# EAGLE board dp (EAGLE 7.5.0)
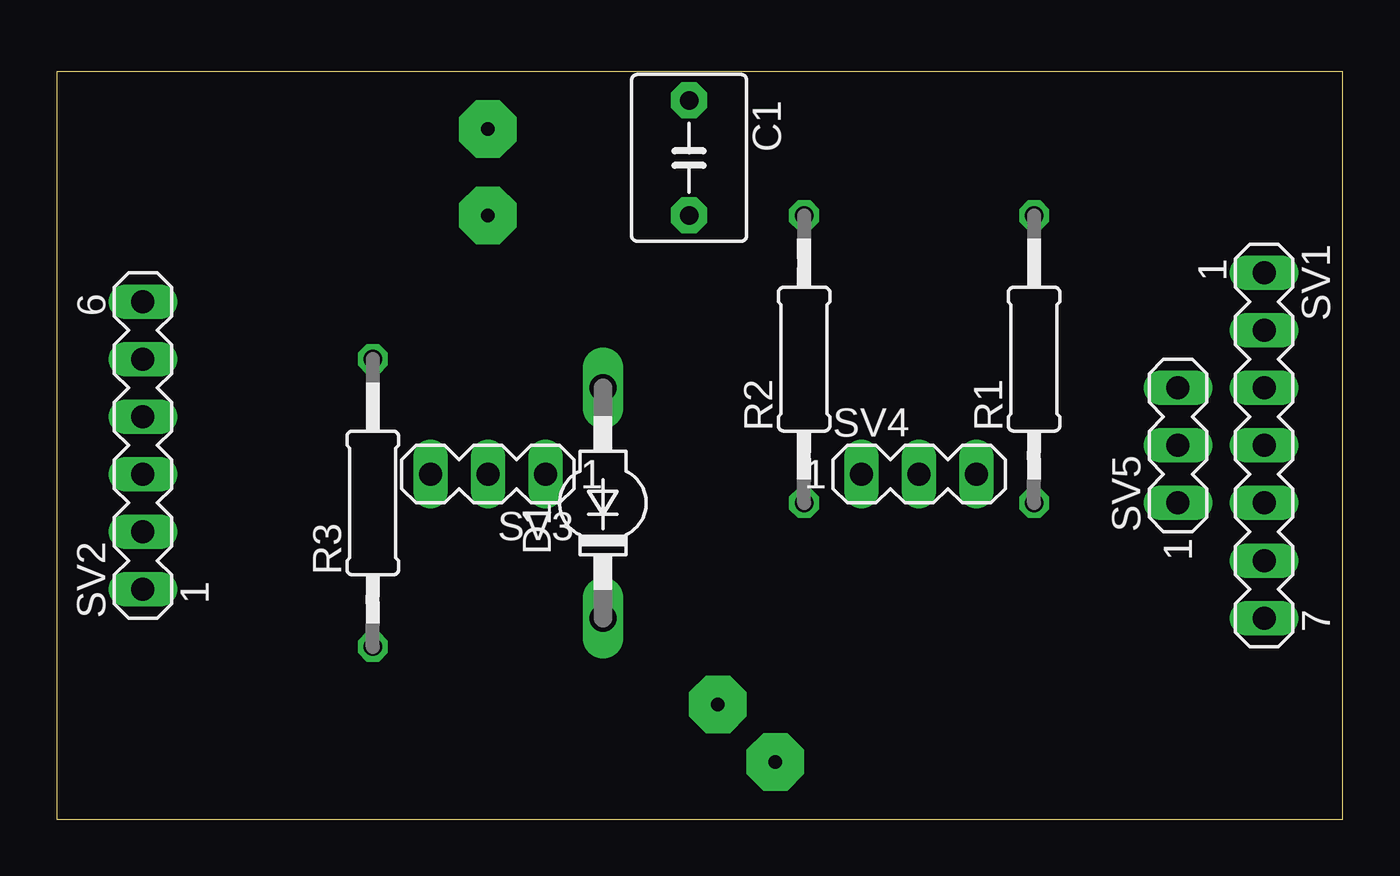
[diagram p0: board, top side]
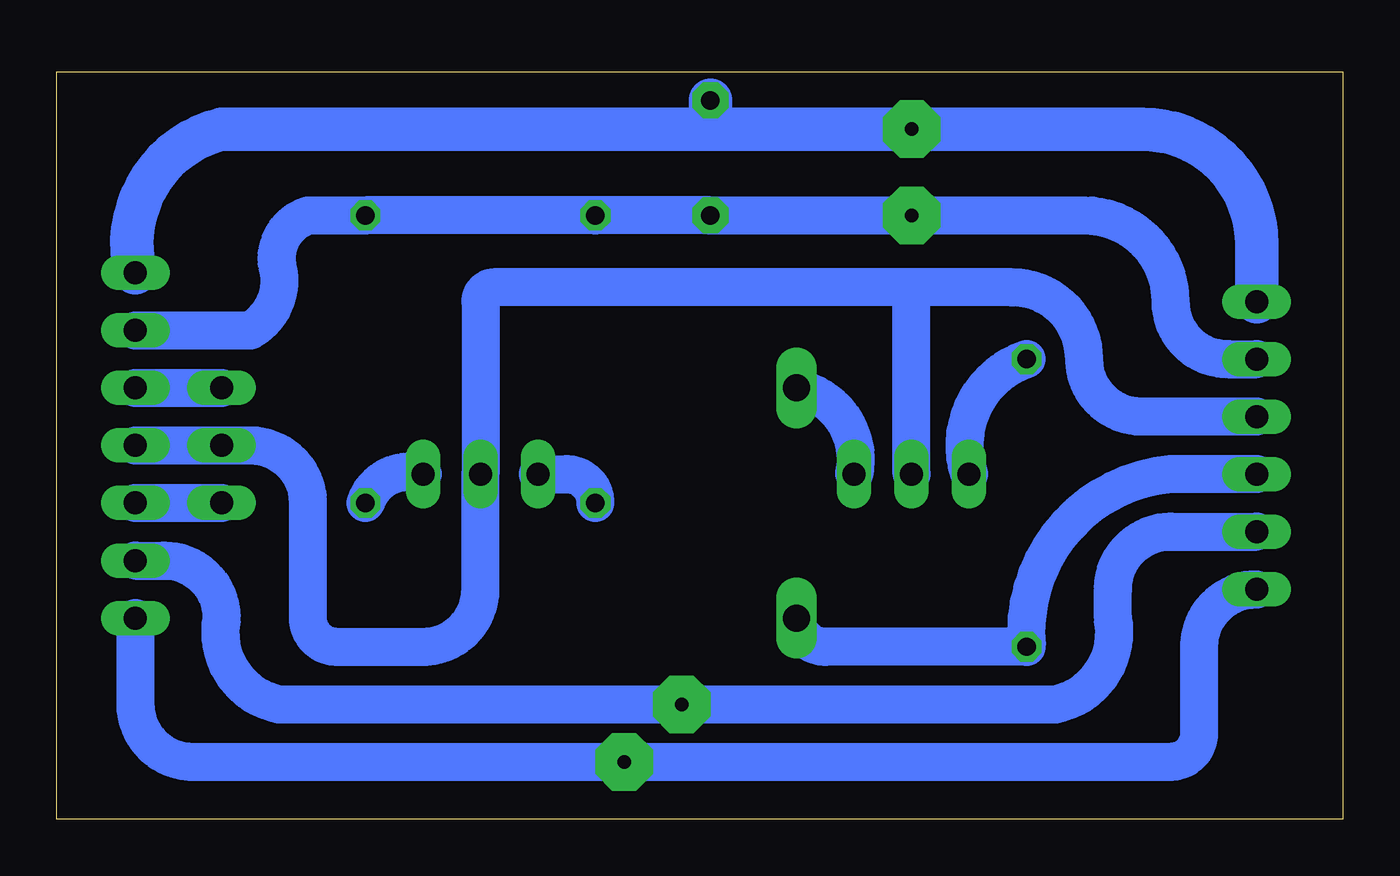
[diagram p1: board, bottom side, seen from below]

Size 56.82 x 33.01 mm. Coordinates in mm from the lower left corner, seen from the top.
Outline: 0,0 56.82,0 56.82,33.01 0,33.01 0,0
Copper layers (1*16): Top 0.035mm / dielectric 1.5mm / Bottom 0.035mm
Design rules "default": minimum track width 10mil, minimum drill 24mil, track to track 8mil, track to pad 8mil, pad to pad 8mil, via to via 8mil, smd to smd 8mil, copper to edge 40mil, drill to drill 8mil, minimum pad ring 10mil, minimum via ring 8mil, stop-mask expansion 4mil, vias tented up to drill 0mil, thermal gap 10mil

## Footprints (pad centres in the part's own frame; a part is rotated, then mirrored left to right if it is on the bottom)
C5B5 = drill 0.813 pad 1.6 octagon: 1 -2.54,0; 2 2.54,0
SOD57-10 = drill 1.194 long: A 5.08,0; C -5.08,0
0207/12 = drill 0.813 octagon: 1 -6.35,0; 2 6.35,0
MA07-1 = drill 1.016 long: 1 -7.62,0; 2 -5.08,0; 3 -2.54,0; 4 0,0; 5 2.54,0; 6 5.08,0; 7 7.62,0
MA06-1 = drill 1.016 long: 1 -6.35,0; 2 -3.81,0; 3 -1.27,0; 4 1.27,0; 5 3.81,0; 6 6.35,0
MA03-1 = drill 1.016 long: 1 -2.54,0; 2 0,0; 3 2.54,0

## Placement (x,y rotation side)
C1  [C5B5]  27.94,29.21 270 top
D1  1N5061  [SOD57-10]  24.13,13.97 90 top
R1  [0207/12]  43.18,20.32 90 top
R2  [0207/12]  33.02,20.32 90 top
R3  [0207/12]  13.97,13.97 90 top
SV1  [MA07-1]  53.34,16.51 270 top
SV2  [MA06-1]  3.81,16.51 90 top
SV3  [MA03-1]  19.05,15.24 180 top
SV4  [MA03-1]  38.1,15.24 0 top
SV5  [MA03-1]  49.53,16.51 90 top

## Library data of the parts
C1 = capacitor-wima
D1 = diode
R1-R3 = rcl
SV1-SV5 = con-lstb; OC_FARNELL: unknown; OC_NEWARK: unknown

## Nets
N$1: C1.2 R1.2 R2.2 SV1.2 SV2.5
N$2: C1.1 SV1.1 SV2.6
N$3: SV1.7 SV2.1
N$4: SV1.6 SV2.2
N$5: D1.C R3.1 SV2.3
N$6: SV1.4 SV2.4 SV3.2 SV4.2 SV5.2
N$7: R3.2 SV3.3
N$8: D1.A SV3.1
N$10: R2.1 SV4.1
N$11: R1.1 SV4.3
N$12: SV1.3 SV5.3
N$13: SV1.5 SV5.1

## Tracks (layer width: path | path; a pad name or v marks a point on that pad's centre or on a via)
N$1
  Bottom 1.676: SV2.5 5.08,20.32 arc90 7.62,22.86 arc-90 11.43,26.67 C1.2 R2.2 R1.2 45.72,26.67 arc-90 46.99,24.13 arc67 48.26,21.59 SV1.2
N$2
  Bottom 1.93: SV2.6 3.81,25.4 arc-90 8.89,30.48 27.94,30.48 | 27.94,30.48 C1.1 | 27.94,30.48 49.53,30.48 arc-90 SV1.1
N$3
  Bottom 1.676: SV1.7 53.34,5.08 arc-90 50.8,2.54 7.62,2.54 arc-90 6.35,3.81 6.35,7.62 arc90 SV2.1
N$4
  Bottom 1.676: SV1.6 52.07,11.43 arc90 49.53,8.89 arc-90 46.99,5.08 12.7,5.08 arc-90 10.16,8.89 10.16,10.16 arc90 7.62,12.7 SV2.2
N$5
  Bottom 1.676: SV2.3 7.62,15.24 arc-90 R3.1 22.86,7.62 arc90 D1.C
N$6
  Bottom 1.676: 19.05,23.5 37.47,23.5 arc-90 38.1,22.86 SV4.2 38.1,10.16 arc90 40.64,7.62 44.45,7.62 arc90 45.72,8.89 45.72,13.97 arc-90 48.26,16.51 SV5.2 SV1.4 | SV3.2 19.05,23.5 | SV2.4 8.89,17.78 arc90 11.43,20.32 arc-90 14.61,23.5 19.05,23.5
N$7
  Bottom 1.676: R3.2 arc-90 SV3.3
N$8
  Bottom 1.676: D1.A arc90 SV3.1
N$9  (via drill 0.6 pad 2.54)
  other vias: 31.75,2.54 19.05,26.67 19.05,30.48 29.21,5.08
N$10
  Bottom 1.676: SV4.1 34.29,15.24 arc90 R2.1
N$11
  Bottom 1.676: SV4.3 arc-90 R1.1
N$12
  Bottom 1.676: SV1.3 SV5.3
N$13
  Bottom 1.676: SV1.5 SV5.1